# Altium PCB BioSens.PcbDoc
Units mm, origin at the board's own origin, x right, y up, seen from the top; angles counter-clockwise.
Board outline 100 x 63 mm, 2 copper layers (Top Layer, Bottom Layer); 106 components, 69 nets, 264 pads, 132 vias.
Unrouted connection lines stored in the file: 6.
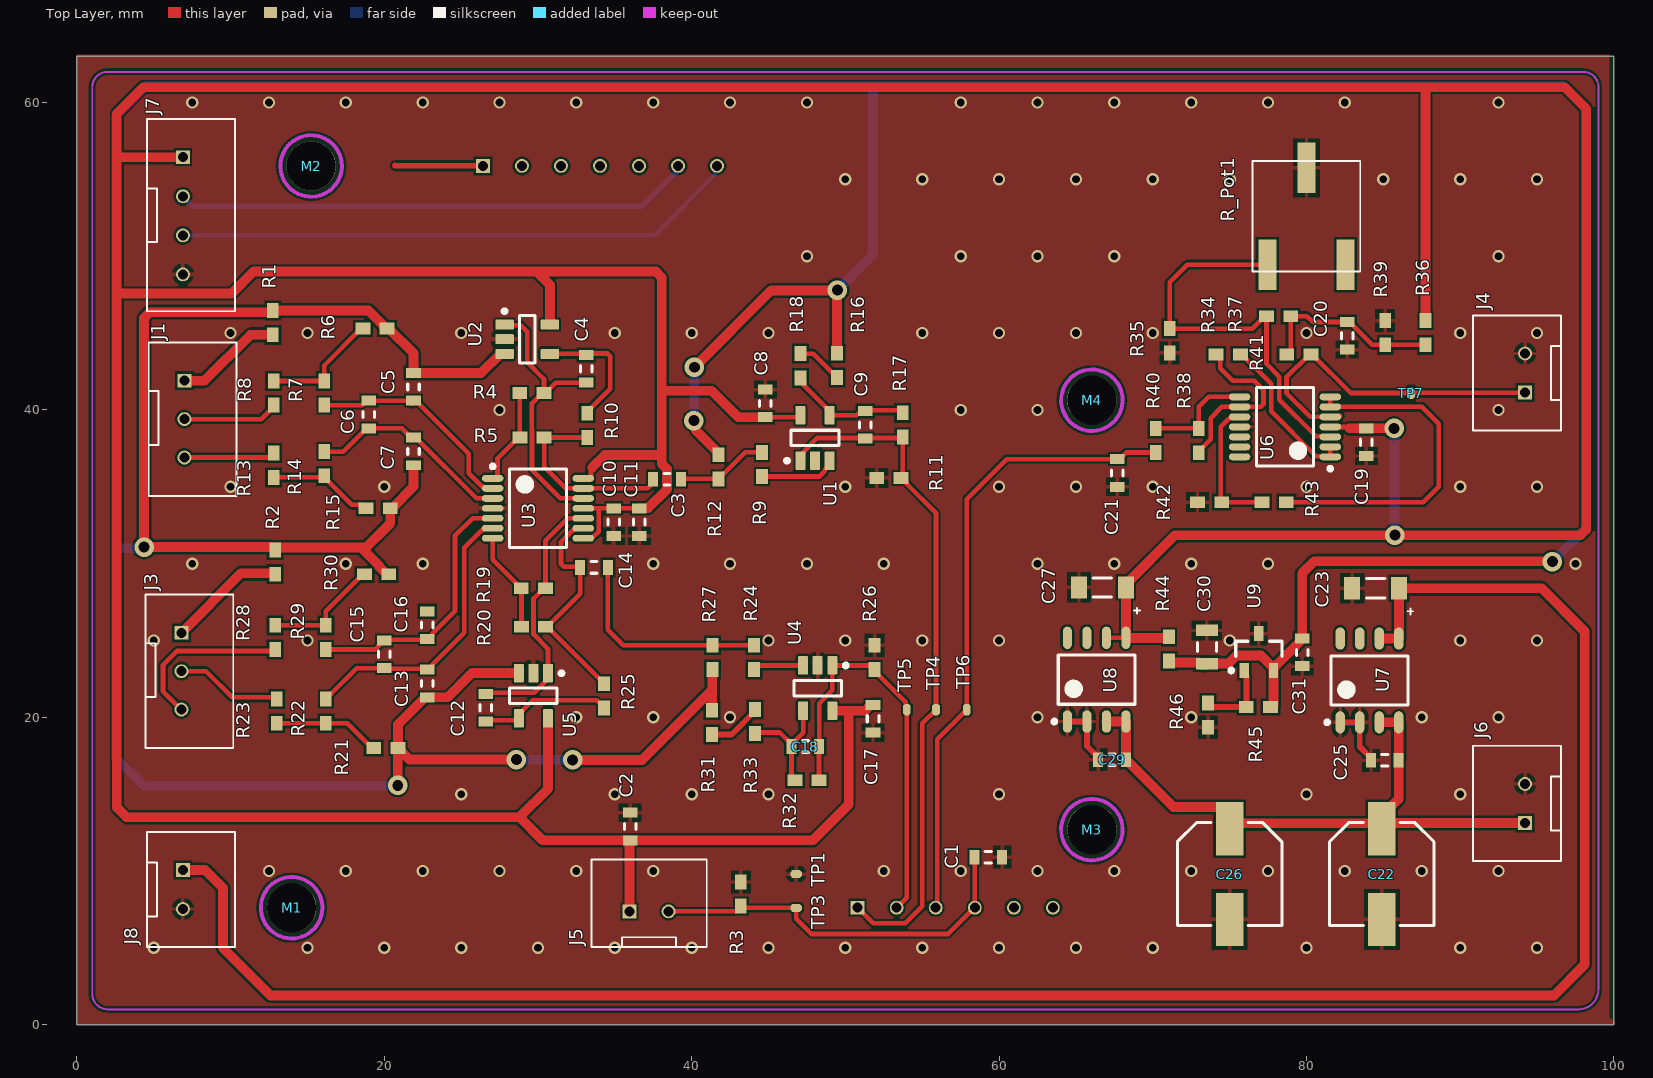
[diagram p0: Top Layer view]
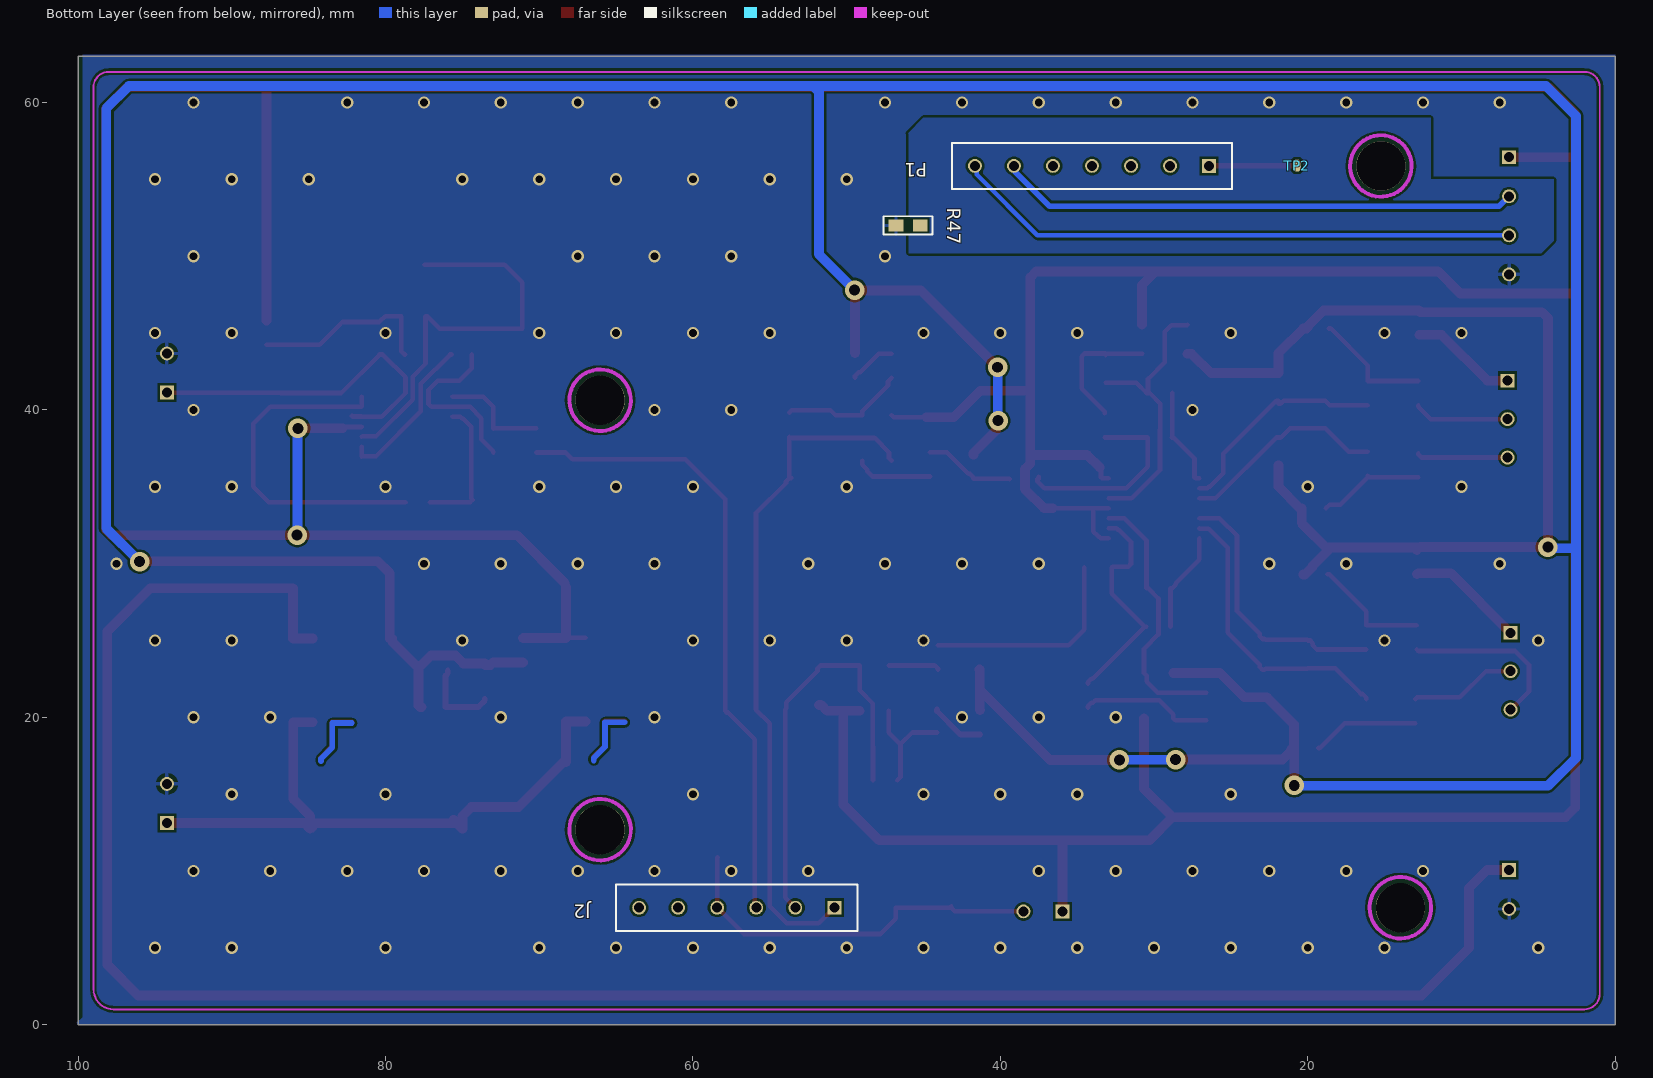
[diagram p1: Bottom Layer view, seen from below]

## Layer stack, top to bottom
Top Solder: solder mask 0.0102, Solder Resist, Dk 3.5
Top Layer: signal copper 0.0356
Dielectric 1: dielectric 0.32, FR-4, Dk 4.8
Bottom Layer: signal copper 0.0356
Bottom Solder: solder mask 0.0102, Solder Resist, Dk 3.5

## Board outline
0,0 0,63 100,63 100,0

## Design rules (kind name [scope] priority, off if disabled: settings)
Clearance [All] p1: gap=0.15 ignorepadtopadclearanceinfootprint=FALSE
HoleSize [All] p1: absolutevalues=TRUE maxlimit=6.3 minlimit=0.2 maxpercent=80.000 minpercent=20.000
HoleToHoleClearance [All] p1: gap=0.5 allowstackedmicrovias=TRUE
PolygonConnect [All] p1: connectstyle=Relief reliefconductorwidth=0.254 reliefentries=4 polygonreliefangle="90 Angle" airgapwidth=0.254
RoutingVias "PWR 3V3" [InNet('3V3')] p1: holewidth=0.635 width=1.27 viastyle="Through Hole" minholewidth=0.508 minwidth=1.27 maxholewidth=0.762 maxwidth=1.27
RoutingVias "PWR 1V25" [InNet('1V25_VREF')] p2: holewidth=0.635 width=1.27 viastyle="Through Hole" minholewidth=0.508 minwidth=1.27 maxholewidth=0.762 maxwidth=1.27
RoutingVias [All] p3: holewidth=0.381 width=1.27 viastyle="Through Hole" minholewidth=0.305 minwidth=0.508 maxholewidth=0.381 maxwidth=1.27
SolderMaskExpansion [All] p1: expansion=0.102 istentingtop=FALSE
Width "Battery In" [InNet('V_Batt')] p1: maxlimit=0.762 minlimit=0.381 preferedwidth=0.635 // 5.5~10V
Width "Power Trace 1V25" [InNet('1V25_VREF')] p2: maxlimit=0.762 minlimit=0.305 preferedwidth=0.635 // 1V25
Width "NET1_1 (EMG)J1" [InNet('NetJ1_1')] p3: maxlimit=0.762 minlimit=0.305 preferedwidth=0.635 // 1V25
Width "NET3_1 (EMG)J1" [InNet('NetJ3_1')] p4: maxlimit=0.762 minlimit=0.305 preferedwidth=0.635 // 1V25
Width "Power Trace 3V3 NRF" [InNet('NetC23_1')] p5: maxlimit=0.762 minlimit=0.305 preferedwidth=0.635 // 3V3
Width "Power Trace 3V3" [InNet('3V3')] p6: maxlimit=0.762 minlimit=0.305 preferedwidth=0.635 // 3V3 Power traces
Width [All] p7: maxlimit=0.381 minlimit=0.152 preferedwidth=0.305
28 further rules are at their usual default settings.

## Classes and differential pairs
component class Top: C1 C2 J1 J2 J3 J4 J5 J6 J7 J8 M1 M2 M3 M4 P1 R1 R2 R3 R47 TP1 TP2 TP3
component class Power: C22 C23 C25 C26 C27 C29 C30 C31 R44 R45 R46 U7 U8 U9
component class GSR: C19 C20 C21 R34 R35 R36 R37 R38 R39 R40 R41 R42 R43 R_Pot1 TP6 TP7 U6
component class EMG_SET: C3 C4 C5 C6 C7 C8 C9 C10 C11 C12 C13 C14 C15 C16 C17 C18 R4 R5 R6 R7 R8 R9 R10 R11 R12 R13 R14 R15 R16 R17 R18 R19 R20 R21 R22 R23 R24 R25 R26 R27 R28 R29 R30 R31 R32 R33 TP4 U1 U2 U3 U4 U5

## Components (designator, comment, footprint, x,y, rotation, side; value= is the part's Value field where it differs from the comment)
C1 "0603 4.7uF" CAP_0603_CER 59.3,10.9 r0 top
C2 "0603 4.7uF" CAP_0603_CER 36,12.9 r90 top
C3 "0603 1uF" CAP_0603_CER 38.393,35.5 r0 top
C4 "0603 1uF" CAP_0603_CER 33.15,42.675 r90 top
C5 "0603 100pF" CAP_0603_CER 21.9,41.5 r270 top
C6 "0603 10nF" CAP_0603_CER 19,39.7 r90 top
C7 "0603 100pF" CAP_0603_CER 21.9,37.3 r270 top
C8 "0603 0.1uF" CAP_0603_CER 44.8,40.425 r270 top
C9 "0603 1uF" CAP_0603_CER 51.3,39.025 r270 top
C10 "0603 0.1uF" CAP_0603_CER 34.925,32.7 r270 top
C11 "0603 1uF" CAP_0603_CER 36.6,32.7 r270 top
C12 "0603 1uF" CAP_0603_CER 26.6,20.625 r270 top
C13 "0603 100pF" CAP_0603_CER 22.8,22.2 r90 top
C14 "0603 1uF" CAP_0603_CER 33.65,29.75 r0 top
C15 "0603 10nF" CAP_0603_CER 20,24.1 r270 top
C16 "0603 100pF" CAP_0603_CER 22.8,26 r90 top
C17 "0603 0.1uF" CAP_0603_CER 51.8,19.9 r90 top
C18 "0603 1uF" CAP_0603_CER 47.4,18.1 r0 top
C19 "0603 0.1uF" CAP_0603_CER 83.9,37.9 r270 top
C20 "0603 0.1uF" CAP_0603_CER 82.65,44.825 r270 top
C21 "0603 0.1uF" CAP_0603_CER 67.7,35.9 r270 top
C22 "100uF" CAPAE7866X61M 84.9,9.8 r270 top
C23 "1206_T 10uF" CAP_1206_TANT 84.5,28.4 r180 top
C25 "0603 0.1uF" CAP_0603_CER 85.1,17.2 r180 top
C26 "100uF" CAPAE7866X61M 75,9.8 r270 top
C27 "1206_T 10uF" CAP_1206_TANT 66.725,28.45 r180 top
C29 "0603 0.1uF" CAP_0603_CER 67.35,17.25 r180 top
C30 "0805 10uF" CAP_0805_CER 73.525,24.575 r90 top
C31 "0603 0.1uF" CAP_0603_CER 79.725,24.225 r270 top
J1 "JSET 2" JST-XH3A 7,39.4 r0 top
J2 "6 Pin Socket" "6 Pin Header" 50.8,7.61 r270 bottom
J3 "JSET 2" JST-XH3A 6.8,23 r0 top
J4 "JSET 2.0" JST_XH2A 93.7,42.4 r180 top
J5 "JSET 2.0" JST_XH2A 37.23,7.9 r90 top
J6 "JSET 2.0" JST_XH2A 93.7,14.4 r180 top
J7 "4 Pin Socket" JST-XH4A 7.425,52.67 r0 top
J8 "JSET 2.0" JST_XH2A 7.425,8.8 r0 top
M1 "Mounting Hole" "Mounting Hole" 13.97,7.61 r0 top
M2 "Mounting Hole" "Mounting Hole" 15.24,55.87 r0 top
M3 "Mounting Hole" "Mounting Hole" 66.04,12.69 r0 top
M4 "Mounting Hole" "Mounting Hole" 66.04,40.63 r0 top
P1 "7 Pin Header" "7 Pin Header" 26.416,55.88 r270 bottom
R1 "0603 0" 0603 12.75,45.675 r270 top
R2 "0603 0" 0603 12.9,30.1 r270 top
R3 "0603 10k 1%" 0603 43.2,8.5 r90 top
R4 "0603 10k 1%" 0603 29.6,41.1 r0 top
R5 "0603 10k 1%" 0603 29.613,38.2 r180 top
R6 "0603 3.3M" 0603 19.4,45.3 r0 top
R7 "0603 2k 1%" 0603 16.1,41.1 r90 top
R8 "0603 2k 1%" 0603 12.8,41.1 r270 top
R9 "0603 0" 0603 44.575,36.45 r90 top
R10 "0603 100k 1%" 0603 33.2,39 r90 top
R11 "0603 10k 1%" 0603 52.825,35.575 r180 top
R12 "0603 1M 1%" 0603 41.75,36.3 r270 top
R13 "0603 2k 1%" 0603 12.8,36.4 r90 top
R14 "0603 2k 1%" 0603 16.1,36.5 r270 top
R15 "0603 3.3M" 0603 19.6,33.6 r0 top
R16 "0603 0" 0603 49.45,42.9 r90 top
R17 "0603 100k 1%" 0603 53.725,39.025 r270 top
R18 "0603 1k 1%" 0603 47.075,42.875 r270 top
R19 "0603 10k 1%" 0603 29.7,28.4 r0 top
R20 "0603 10k 1%" 0603 29.713,25.9 r180 top
R21 "0603 3.3M" 0603 20.1,18 r0 top
R22 "0603 2k 1%" 0603 16.2,20.4 r270 top
R23 "0603 2k 1%" 0603 13,20.4 r90 top
R24 "0603 0" 0603 44.05,23.9 r90 top
R25 "0603 100k 1%" 0603 34.3,21.4 r270 top
R26 "0603 10k 1%" 0603 51.9,23.9 r90 top
R27 "0603 1M 1%" 0603 41.35,23.9 r90 top
R28 "0603 2k 1%" 0603 12.9,25.2 r270 top
R29 "0603 2k 1%" 0603 16.2,25.2 r90 top
R30 "0603 3.3M" 0603 19.5,29.3 r0 top
R31 "0603 0" 0603 41.325,19.675 r90 top
R32 "0603 100k 1%" 0603 47.5,15.9 r0 top
R33 "0603 1k 1%" 0603 44.125,19.725 r270 top
R34 "0603 100k 1%" 0603 74.913,43.6 r180 top
R35 "0603 0" 0603 71.1,44.5 r270 top
R36 "0603 4.7k 1%" 0603 87.75,45.025 r270 top
R37 "0603 200k 1%" 0603 78.187,46.1 r180 top
R38 "0603 200k 1%" 0603 73,38 r270 top
R39 "0603 4.7k 1%" 0603 85.125,45.025 r90 top
R40 "0603 1M" 0603 70.2,38.013 r270 top
R41 "0603 200k 1%" 0603 79.5,43.6 r0 top
R42 "0603 200k 1%" 0603 73.7,34 r0 top
R43 "0603 100k 1%" 0603 77.9,34 r0 top
R44 "0603 330" 0603 71.05,24.45 r270 top
R45 "0603 2k 1%" 0603 76.875,20.675 r180 top
R46 "0603 10k 1%" 0603 73.6,20.137 r270 top
R47 "0603 0" 0603 46,52 r180 bottom
R_Pot1 "200k Pot" R_200k_Pot 80,52.6 r0 top
TP1 "0402_TEST_PT" 0402_PAD#1 46.8,9.8 r0 top
TP2 "0402_TEST_PT" 0402_PAD#2 20.7,55.9 r90 top
TP3 "0402_TEST_PT" 0402_PAD#1 46.8,7.6 r0 top
TP4 "0402_TEST_PT" 0402_PAD#1 55.9,20.5 r270 top
TP5 "0402_TEST_PT" 0402_PAD#1 54,20.5 r90 top
TP6 "0402_TEST_PT" 0402_PAD#1 57.9,20.5 r90 top
TP7 "0402_TEST_PT" 0402_PAD#1 86.8,41.1 r90 top
U1 "OPA333AIDBVT" DBV0005A_M 48.025,38.175 r90 top
U2 "OPA333AIDBVT" DBV0005A_M 29.3,44.6 r0 top
U3 "INA2331AIPWR" TSOP65P640X120-14N 30,33.6 r0 top
U4 "OPA333AIDBVT" DBV0005A_M 48.2,21.9 r270 top
U5 "OPA333AIDBVT" DBV0005A_M 29.7,21.4 r270 top
U6 "LM324PW" TSOP65P640X120-14N 78.6,38.9 r180 top
U7 "TPS76733QDR" SOIC127P600X175-8N 84.1,22.4 r90 top
U8 "TPS76733QDR" SOIC127P600X175-8N 66.35,22.45 r90 top
U9 "AZ432ANTR-G1" SOT95P245X110-3N 76.9,24.25 r90 top

## Footprints (in the part's own frame and the unit in brackets; to place one, negate y for a bottom-side part, rotate by r counter-clockwise, add the part's x,y. Pads: shape width x height; smd on the part's side, far side on the other; paste and mask are expansions set on the pad)
"6 Pin Header" [mm] "Biosignals output to NRF Digital IN"
  rect 0.904x0.904 hole 0.65: 1(0,0)
  round 0.904 hole 0.65: 2(0,-2.54) 3(0,-5.08) 4(0,-7.62) 5(0,-10.16) 6(0,-12.7)
  silkscreen extent -1.5,-14.2 1.5,1.5
"7 Pin Header" [mm] "Biosignals output to NRF Digital IN"
  rect 0.904x0.904 hole 0.65: 1(0,0)
  round 0.904 hole 0.65: 2(0,-2.54) 3(0,-5.08) 4(0,-7.62) 5(0,-10.16) 6(0,-12.7) 7(0,-15.24)
  silkscreen extent -1.5,-16.74 1.5,1.5
0402_PAD#1 [mil]
  oct 30x20 smd paste-2.5 mask+1: 1(0,0)
0402_PAD#2 [mil]
  oct 30x20 smd far side paste-2.5 mask+1: 1(0,0)
0603 [mil]
  rect 38x30 smd mask+2.5: 1(-31,0) 2(31,0)
CAP_0603_CER [mm] "Ceremic Cap 0603"
  rect 0.65x0.95 smd: 1(-0.9,0) 2(0.9,0)
  silkscreen extent -0.2,-0.38 0.2,0.38, body extent -0.85,-0.45 0.85,0.45, height 0.9
CAP_0805_CER [mm] "Ceremic Cap 0805"
  rect 0.75x1.45 smd: 1(-1.075,0) 2(1.075,0)
  silkscreen extent -0.3,-0.62 0.3,0.63, body extent -1.1,-0.72 1.1,0.72, height 1.45
CAP_1206_TANT [mm] "Tantalum Cap 1206"
  rect 1.05x1.45 smd: 1(-1.525,0) 2(1.525,0)
  silkscreen extent -2.44,-0.62 0.6,1.7, body extent -1.7,-0.65 1.7,0.65, height 1.8
CAPAE7866X61M [mm] "Aluminum Electrolytic Capacitor, Body 6.35x6.60x6.10mm, IPC Low Density"
  rect 3.45x1.8 smd: 1(-2.95,0) 2(2.95,0)
  silkscreen extent -3.35,-3.4 3.35,3.4, body extent -3.4,-3.4 3.4,3.4, height 6.1
DBV0005A_M [mm] "SOT23, 5-Leads, Body 3.05x1.75mm, Pitch 0.95mm, IPC Low Density"
  rrect15% 1.2x0.65 smd: 1(-1.475,0.95) 2(-1.475,0) 3(-1.475,-0.95) 4(1.475,-0.95) 5(1.475,0.95)
  silkscreen extent -1.6,-1.55 0.5,1.95, body extent -1.42,-1.46 1.42,1.46, height 1.08
JST-XH3A [mm]
  rect 0.904x0.904 hole 0.65: 1(0,2.5)
  round 0.904 hole 0.65: 2(0,0) 3(0,-2.5)
  silkscreen extent -2.32,-5 3.37,5
JST-XH4A [mm]
  rect 0.904x0.904 hole 0.65: 1(-0.525,3.77)
  round 0.904 hole 0.65: 2(-0.525,1.23) 3(-0.525,-1.31) 4(-0.525,-3.85)
  silkscreen extent -2.85,-6.25 2.85,6.25
JST_XH2A [mm]
  rect 0.904x0.904 hole 0.65: 1(-0.525,1.27)
  round 0.904 hole 0.65: 2(-0.525,-1.27)
  silkscreen extent -2.85,-3.75 2.85,3.75
"Mounting Hole" [mm]
  round 3.2 hole 3.2: 1(0,0)
R_200k_Pot [mm]
  rect 1.19x3.3 smd: 1(2.54,-3.15) 2(0,3.15) 3(-2.54,-3.15)
  silkscreen extent -3.5,-3.6 3.5,3.6
SOIC127P600X175-8N [mm] "SOIC, 8-Leads, Body 4.91x3.90mm, Pitch 1.27mm, IPC Medium Density"
  oval 1.45x0.6 smd: 1(-2.725,1.905) 2(-2.725,0.635) 3(-2.725,-0.635) 4(-2.725,-1.905) 5(2.725,-1.905) 6(2.725,-0.635) 7(2.725,0.635) 8(2.725,1.905)
  silkscreen extent -2.85,-2.5 1.6,2.88, body extent -2,-2.5 2,2.5, height 1.75
SOT95P245X110-3N [mm] "SOT23, 3-Leads, Body 2.90x2.45mm, Pitch 0.95mm, IPC Medium Density"
  rect 1x0.6 smd: 1(-1.2,0.95) 2(-1.2,-0.95) 3(1.2,0)
  silkscreen extent -1.32,-1.5 0.7,1.92, body extent -0.7,-1.5 0.7,1.5, height 1.1
TSOP65P640X120-14N [mm] "TSOP, 14-Leads, Body 5.00x4.40mm, Pitch 0.65mm, IPC Medium Density"
  oval 1.4x0.45 smd: 1(-2.95,1.95) 2(-2.95,1.3) 3(-2.95,0.65) 4(-2.95,0) 5(-2.95,-0.65) 6(-2.95,-1.3) 7(-2.95,-1.95) 8(2.95,-1.95) 9(2.95,-1.3) 10(2.95,-0.65) 11(2.95,0) 12(2.95,0.65) 13(2.95,1.3) 14(2.95,1.95)
  silkscreen extent -3.07,-2.55 1.85,2.85, body extent -2.25,-2.55 2.25,2.55, height 1.2

## Part data
C1 C2: library part CAP_NP, "Generic Cap for NC (No Polar) / ESR <30mOhm / ESL <1.5nH, / X5R", Capacitance=4.7uF, Dielectric=X5R, Manufacturer="Samsung Electro-Mechanics", Manufacturer Part Number=CL10A475KO8NNNC, Package=0603, Supplier Part Number 1=1276-1784-1-ND, ComponentLink1Description="New link", Supplier 1=Digi-Key
C3 C4 C11 C12 C14: library part CAP_NP, "Generic Cap for NC (No Polar) / ESR <30mOhm / ESL <1.5nH, / X5R", Capacitance=1uF, Dielectric=X7R, Manufacturer=KEMET, Manufacturer Part Number=C0603C105K8RAC7867, Package=0603, ComponentLink1Description="New link"
C5 C7 C13 C16: library part CAP_NP, "Generic Cap for NC (No Polar) / ESR <30mOhm / ESL <1.5nH, / C0G", Capacitance=100pF, Dielectric=C0G, Manufacturer=KEMET, Manufacturer Part Number=C0603C101J3GAC7867, Package=0603, ComponentLink1Description="New link"
C6 C15: library part CAP_NP, "Generic Cap for NC (No Polar) / ESR <30mOhm / ESL <1.5nH, / X7R", Capacitance=10nF, Dielectric=X7R, Manufacturer=KEMET, Manufacturer Part Number=C0603C103K4REC7867, Package=0603, ComponentLink1Description="New link"
C8 C10 C17 C19 C20 C31: library part CAP_NP, "Generic Cap for NC (No Polar) / ESR <30mOhm / ESL <1.5nH, / X7R", Capacitance=0.1uF, Dielectric=X7R, Manufacturer=KEMET, Manufacturer Part Number=C0603C104K5RAC7867, Package=0603, ComponentLink1Description="New link"
C9 C18: library part CAP_NP, "Generic Cap for NC (No Polar) / ESR <30mOhm / ESL <1.5nH, / X7R", Capacitance=1uF, Dielectric=X7R, Manufacturer=KEMET, Manufacturer Part Number=C0603C105K8RAC7867, Package=0603, ComponentLink1Description="New link"
C21: library part CAP_NP, "Generic Cap for NC (No Polar) / ESR <30mOhm / ESL <1.5nH, / X7R or X5R", Capacitance=0.1uF, Dielectric=X7R, Manufacturer=KEMET, Manufacturer Part Number=C0603C104K5RAC7867, Package=0603, ComponentLink1Description="New link"
C22 C26: library part CAP_POL, "Electrolytic 100uF", Manufacturer="Cornell Dubilier Electronics (CDE)", Manufacturer Part Number=AFK107M16D16T-F, Package=CAPAE, Supplier Part Number 1=338-2140-1-ND, Capacitance=100uF, Supplier 1=Digi-Key
C23 C27: library part CAP_POL, "Tantalum CAP / ESR: 900mOhm / Rated: 10V", Capacitance=10uF, Manufacturer="KYOCERA AVX", Manufacturer Part Number=TPSA106K010R0900, Package=1206, Supplier Part Number 1=478-1751-1-ND, Tolerance="+/- 10%", ESR="900m Ohm", Supplier 1=Digi-Key
C25 C29: library part CAP_NP, "Generic Cap for NC (No Polar) / ESR <30mOhm / ESL <1.5nH, / X7R", Capacitance=0.1uF, Dielectric=X7R, Manufacturer="KYOCERA AVX", Manufacturer Part Number=06033C104K4T4A, Package=0603, Supplier Part Number 1=478-10673-1-ND, ComponentLink1Description="New link", Supplier 1=Digi-Key
C30: library part CAP_NP, "Generic Cap for NC (No Polar) / ESR <30mOhm / ESL <1.5nH, / X7R", Capacitance=10uF, Dielectric=X7R, Manufacturer=KEMET, Manufacturer Part Number=C0805C106M8RACTU, Package=0603, ComponentLink1Description="New link"
J1 J3: library part "JST 3 Pin", "JST-XH3A"
J2: "Headers for Signal to NRF"
J4 J5 J6 J8: library part "JST 2 Pin", "PA Series 2 Position 2 mm Pitch Top Entry No Boss Through Hole Shrouded Header", Color=Natural, Housing Color=White, Manufacturer=JST, Manufacturer Part Number=B02B-PASK(LF)(SN), Category="Headers and Wire Housings", ComponentLink1Description=https://datasheet.ciiva.com/712/epa-f-712485.pdf?src-supplier=Digi-Key, ComponentLink1URL=https://datasheet.ciiva.com/712/epa-f-712485.pdf?src-supplier=Digi-Key, Connector Type="Male Pin", Contact Material="Copper Alloy", Contact Mating Length=0.126inch, Contact Plating=Tin, Contact Type="Male Pin", Fastening Type=Ramp, Lead Free="Lead Free", Mount="Through Hole", Number of Contacts=2, Number of Positions=2, Number of Rows=1, Packaging=Bulk, Pitch=0.079inch, Pricing 1="1=0.25000, 10=0.20800, 100=0.15980, 500=0.13522, 1000=0.11064, 5000=0.09835, 10000=0.08913 (USD)", RoHS=Yes, Series=PA, Stock 1=64007, Termination="Kinked Pin"
J7: library part "JST 4 Pin", "Connector Header, PA Series, Top Entry , 4 Position, Male Pin, 1 Row, 2.0mm, Through Hole, Natural", Color=Natural, Housing Color=White, Manufacturer=JST, Manufacturer Part Number=B04B-PASK(LF)(SN), Supplier Part Number 1=455-1819-ND, Category=Connectors, ComponentLink1Description=https://datasheet.ciiva.com/712/epa-f-712564.pdf?src-supplier=Digi-Key, ComponentLink1URL=https://datasheet.ciiva.com/712/epa-f-712564.pdf?src-supplier=Digi-Key, Connector Type="Male Pin", Contact Material="Copper Alloy", Contact Mating Length=0.126inch, Contact Plating=Tin, Contact Type="Male Pin", Fastening Type=Ramp, Lead Free="Lead Free", Mount="Through Hole", Number of Contacts=4, Number of Positions=4, Number of Rows=1, Packaging=Bulk, Pitch=0.079inch, Pricing 1="1=0.34000, 10=0.28700, 100=0.22360, 500=0.19162, 1000=0.15968, 5000=0.13687, 10000=0.12774 (USD)", RoHS=Yes, Series=PA, Stock 1=11525, Supplier 1=Digi-Key, Termination="Kinked Pin"
P1: library part "7 Pin Socket", "KK 254 Wire-to-Board Header Single Row Vertical 7 Circuits PA Polyamide Nylon Tin (Sn) Plating", Color=White, Contact Resistance=10mR, Current Rating=4A, Flammability Rating="UL94 V-0", Insulation Resistance=50GR, Manufacturer=Molex, Manufacturer Part Number=22-03-2071, Max Operating Temperature=75°C, Max Voltage Rating (AC)=250V, Min Operating Temperature=0°C, Supplier Part Number 1=WM4005-ND, Category="Headers and Wire Housings", ComponentLink1Description=https://datasheet.ciiva.com/5147/0022032071-pcb-headers-158424-5147929.pdf?src-supplier=Mouser, ComponentLink1URL=https://datasheet.ciiva.com/5147/0022032071-pcb-headers-158424-5147929.pdf?src-supplier=Mouser, ComponentLink2Description=https://datasheet.ciiva.com/11747/0900766b80027332-11747589.pdf?src-supplier=RSComponents, ComponentLink2URL=https://datasheet.ciiva.com/11747/0900766b80027332-11747589.pdf?src-supplier=RSComponents, ComponentLink3Description=https://datasheet.ciiva.com/16656/0022032071-pcb-headers-16656194.pdf?src-supplier=Avnet+Europe, ComponentLink3URL=https://datasheet.ciiva.com/16656/0022032071-pcb-headers-16656194.pdf?src-supplier=Avnet+Europe, ComponentLink4Description=https://datasheet.ciiva.com/19461/878614-19461332.pdf?src-supplier=Jameco, ComponentLink4URL=https://datasheet.ciiva.com/19461/878614-19461332.pdf?src-supplier=Jameco, ComponentLink5Description=https://datasheet.ciiva.com/10087/0022032071-pcb-headers-10087718.pdf?src-supplier=Avnet, ComponentLink5URL=https://datasheet.ciiva.com/10087/0022032071-pcb-headers-10087718.pdf?src-supplier=Avnet, ComponentLink6Description=https://datasheet.ciiva.com/1433/1533907-1433547.pdf?src-supplier=Element14, ComponentLink6URL=https://datasheet.ciiva.com/1433/1533907-1433547.pdf?src-supplier=Element14, ComponentLink7Description=https://datasheet.ciiva.com/1433/1831754-1433548.pdf?src-supplier=Element14, ComponentLink7URL=https://datasheet.ciiva.com/1433/1831754-1433548.pdf?src-supplier=Element14, ComponentLink8Description=https://datasheet.ciiva.com/15217/getdatasheetpartid-176575-15217532.pdf?src-supplier=Verical, ComponentLink8URL=https://datasheet.ciiva.com/15217/getdatasheetpartid-176575-15217532.pdf?src-supplier=Verical, Contact Gender=Male, Contact Material=Brass, Contact Mating Length=0.295inch, Contact Plating=Tin,Copper, Contact Type="Male Pin", Depth=2.34mm, Gender=Male, Glow Wire Compliant=Non-compliant, Halogen Free="Low Halogen", Height=6.3mm, Housing Color=White, Housing Material=Nylon, Lead Free="Lead Free", Length=17.53mm, Max Current Rating=4A, Mount="Through Hole", Number of Circuits=7, Number of Contacts=7, Number of Positions=7, Number of Rows=1, Orientation=Straight, Packaging=Bulk, Pitch=2.54mm, Pricing 1="1=0.82000, 10=0.69600, 100=0.54110, 1000=0.42516, 5000=0.37362, 10000=0.34785 (USD)", Radiation Hardening=No, REACH SVHC=Unknown, RoHS=Yes, RoHS Compliant=Yes, Series="KK® 4030", Stock 1=11624, Supplier 1=Digi-Key, Termination=Solder, Voltage Rating=250V, Voltage Rating (DC)=250V, Weight=0.016932oz
R1 R2 R9 R16 R24 R31 R47: library part RESISTOR, "Generic Resistor", Manufacturer=YAGEO, Package=0603, Resistance=0
R3 R4 R5 R11 R19 R20 R26 R46: library part RESISTOR, "Generic Resistor", Manufacturer=YAGEO, Package=0603, Resistance=10k
R6 R15: library part RESISTOR, "Generic Resistor", Package=0603
R7 R8 R13 R14 R22 R23 R28 R29 R45: library part RESISTOR, "Generic Resistor", Manufacturer=YAGEO, Package=0603, Resistance=2k
R10 R17 R25 R32: library part RESISTOR, "Generic Resistor", Manufacturer="Vishay Dale", Package=0603, Resistance=100k
R12 R27: library part RESISTOR, "Generic Resistor", Package=0603, Resistance=1M
R18 R33: library part RESISTOR, "Generic Resistor", Manufacturer="Vishay Dale", Package=0603, Resistance=1k
R21 R30: library part RESISTOR, "Generic Resistor", Package=0603, Resistance=3.3M
R34 R43: library part RESISTOR, "Generic Resistor", Manufacturer="Vishay Dale", Manufacturer Part Number=CRCW0402100KFKEDC, Package=0603, Resistance=100k
R35: library part RESISTOR, "Generic Resistor", Manufacturer=YAGEO, Manufacturer Part Number=RC0402FR-070RL, Package=0603, Resistance=0
R36 R39: library part RESISTOR, "Generic Resistor", Manufacturer=YAGEO, Manufacturer Part Number=RC0402FR-074K7L, Package=0603, Resistance=4.7k
R37 R38 R41 R42: library part RESISTOR, "Generic Resistor", Manufacturer=YAGEO, Manufacturer Part Number=RC0402FR-13200KL, Package=0603, Resistance=200k
R40: library part RESISTOR, "Generic Resistor", Manufacturer=YAGEO, Manufacturer Part Number=RC0402FR-071ML, Package=0603, Resistance=1M
R44: library part RESISTOR, "Generic Resistor", Package=0603, Resistance=330
R_Pot1: library part R200k_Pot, "SMD Single-Turn Trimmer Potentiometers 1/4 SQ 200KOHMS 10% 0.5WATTS", Manufacturer=Bourns, Manufacturer Part Number=3361P-1-204GLF, Max Operating Temperature=125°C, Max Power Dissipation=500mW, Min Operating Temperature=-55°C, Package Quantity=750, Resistance=200kR, Resistor Type=Cermet, Supplier Part Number 1=3361P-1-204GLFCT-ND, Temperature Coefficient=100ppm/°C, Tolerance=10%, Category="Variable Resistors and Potentiometers", ComponentLink1Description=https://datasheet.ciiva.com/2157/3361-2157333.pdf?src-supplier=Digi-Key, ComponentLink1URL=https://datasheet.ciiva.com/2157/3361-2157333.pdf?src-supplier=Digi-Key, ComponentLink2Description=https://datasheet.ciiva.com/2157/3361-2157335.pdf?src-supplier=Digi-Key, ComponentLink2URL=https://datasheet.ciiva.com/2157/3361-2157335.pdf?src-supplier=Digi-Key, ComponentLink3Description=https://datasheet.ciiva.com/2157/3361-2157334.pdf?src-supplier=Digi-Key, ComponentLink3URL=https://datasheet.ciiva.com/2157/3361-2157334.pdf?src-supplier=Digi-Key, ComponentLink4Description=https://datasheet.ciiva.com/15156/getdatasheetpartid-347912-15156998.pdf?src-supplier=Verical, ComponentLink4URL=https://datasheet.ciiva.com/15156/getdatasheetpartid-347912-15156998.pdf?src-supplier=Verical, Contact Plating=Tin,Matte, Depth=8.53mm, Height=0.192inch, Length=6.71mm, Military Standard=Not, Mount="Surface Mount", Number of Turns=1, Packaging="Tape and Reel", Power Rating=500mW, Pricing 1="1=1.26000, 10=1.11000, 25=0.99920, 50=0.96200, 100=0.92500, 250=0.86952 (USD)", Radiation Hardening=No, RoHS=Yes, RoHS Compliant=Yes, Series="Trimpot® 3361 - Sealed", Stock 1=1039, Supplier 1=Digi-Key, Technology=CERMET, Termination="Gull Wing", Width=0.264inch
U1 U2 U4 U5: library part CMP-014-00019-2, "MicroPower, Zero Drift CMOS Operational Amplifier, 1.8 to 5.5 V, 17 uA, -40 to 125 degC, 5-Pin SOT23 (DBV5), Green (RoHS & no Sb/Br), Tape and Reel", Case/Package=SOT-23-5, Manufacturer="Texas Instruments (TI)", Max Dual Supply Voltage=2.75V, Max I/O Voltage=10uV, Max Operating Temperature=125°C, Min Dual Supply Voltage=900mV, Min Operating Temperature=-40°C, Nominal Supply Current=25uA, Nominal Voltage Gain=130dB, Output Current=5mA, Package Description="5-Pin Small Outline Transistor, Body 2.9 x 1.6 mm, Pitch 0.95 mm", Package Quantity=250, Package Reference=DBV0005A, Channels=1, Common Mode Rejection Ratio=106dB, Datasheet URL=http://www.ti.com/general/docs/lit/getliterature.tsp?genericPartNumber=OPA333&fileType=pdf, Datasheet Version="SBOS351E, 12/2015", Manufacturer URL=http://www.ti.com/, Max Supply Voltage=2.75V, Min Supply Voltage=900mV, Mounting Technology=SM, Nominal Gain Bandwith Product=350KHz, Package URL=http://www.ti.com/lit/ml/mpds018l/mpds018l.pdf, Packaging=TapeandReel, Pins=5, RoHS Compliant=True, Slew Rate=0.16V/us, Unity Gain Bandwidth Product=350KHz
U3: "Low-power, single-supply, CMOS, instrumentation amplifier 14-TSSOP -55 to 125", Case/Package=TSSOP, Input Bias Current=10pA, Input Offset Voltage (Vos)=1mV, Input Resistance=10000GR, Manufacturer="Texas Instruments", Max Operating Temperature=125°C, Max Supply Voltage=5.5V, Min Operating Temperature=-55°C, Min Supply Voltage=2.7V, Nominal Supply Current=980uA, Operating Supply Current=415uA, Output Current per Channel=48mA, Package Quantity=1, Power Supply Rejection Ratio (PSRR)=86.02dB, Supplier Part Number 1=296-44980-1-ND, Voltage Gain=60dB, -3db Bandwidth=2MHz, Bandwidth=2MHz, Category="Amplifiers - Op Amps, Buffer, Instrumentation", Common Mode Rejection Ratio=80dB, ComponentLink1Description=https://datasheet.ciiva.com/1814/ina2331-1814816.pdf?src-supplier=Digi-Key, ComponentLink1URL=https://datasheet.ciiva.com/1814/ina2331-1814816.pdf?src-supplier=Digi-Key, ComponentLink2Description=https://datasheet.ciiva.com/15128/getdatasheetpartid-248786-15128608.pdf?src-supplier=Verical, ComponentLink2URL=https://datasheet.ciiva.com/15128/getdatasheetpartid-248786-15128608.pdf?src-supplier=Verical, ComponentLink3Description=https://datasheet.ciiva.com/26852/ina2331aipwr-26852132.pdf?src-supplier=IIIC, ComponentLink3URL=https://datasheet.ciiva.com/26852/ina2331aipwr-26852132.pdf?src-supplier=IIIC, ComponentLink4Description=https://datasheet.ciiva.com/1814/ina2331-1814814.pdf?src-supplier=Digi-Key, ComponentLink4URL=https://datasheet.ciiva.com/1814/ina2331-1814814.pdf?src-supplier=Digi-Key, ComponentLink5Description=https://datasheet.ciiva.com/1814/ina2331-1814815.pdf?src-supplier=Digi-Key, ComponentLink5URL=https://datasheet.ciiva.com/1814/ina2331-1814815.pdf?src-supplier=Digi-Key, ComponentLink6Description=https://datasheet.ciiva.com/2978/ina331-2978080.pdf?src-supplier=Avnet, ComponentLink6URL=https://datasheet.ciiva.com/2978/ina331-2978080.pdf?src-supplier=Avnet, Contact Plating=Gold, Gain Bandwidth Product=2MHz, Lead Free="Lead Free", Manufacturer Part Number=INA2331AIPWR, Number of Channels=2, Number of Circuits=2, Number of Elements=6, Number of Pins=14, Packaging="Tape and Reel", Pricing 1="1=3.12000, 10=2.79800, 25=2.64480, 100=2.29230, 250=2.17476, 500=1.95140, 1000=1.94075 (USD)", Quiescent Current=415uA, Radiation Hardening=No, RoHS=Yes, RoHS Compliant=Yes, Series=-, Slew Rate=5V/µs, Stock 1=163, Supplier 1=Digi-Key, Supply Current=980uA
U6: "Integrated Circuit Operational Amplifier LM324/TSSOP/LM324PW TEXAS INSTRUMENT RoHS TSSOP14", Case/Package=TSSOP, Dual Supply Voltage=9V, Input Bias Current=250nA, Input Offset Voltage (Vos)=7mV, Manufacturer="Texas Instruments", Max Dual Supply Voltage=16V, Max Operating Temperature=70°C, Max Supply Voltage=32V, Min Dual Supply Voltage=1.5V, Min Operating Temperature=0°C, Min Supply Voltage=3V, Nominal Supply Current=3mA, Operating Supply Current=1.4mA, Output Current=30mA, Output Current per Channel=60mA, Package Quantity=90, Supplier Part Number 1=296-26098-5-ND, Voltage Gain=100dB, Amplifier Type="GENERAL PURPOSE", Bandwidth=1.2MHz, Category="Amplifiers - Op Amps, Buffer, Instrumentation", Common Mode Rejection Ratio=65dB, ComponentLink1Description=https://datasheet.ciiva.com/1796/lm324-1796594.pdf?src-supplier=Digi-Key, ComponentLink1URL=https://datasheet.ciiva.com/1796/lm324-1796594.pdf?src-supplier=Digi-Key, ComponentLink2Description=https://datasheet.ciiva.com/7709/1633632-7709818.pdf?src-supplier=Element14, ComponentLink2URL=https://datasheet.ciiva.com/7709/1633632-7709818.pdf?src-supplier=Element14, Gain Bandwidth Product=1.2MHz, Height=1.15mm, Lead Free="Lead Free", Length=5mm, Manufacturer Part Number=LM324PW, Mount="Surface Mount", Number of Amplifiers=4, Number of Channels=4, Number of Circuits=4, Number of Elements=4, Number of Pins=14, Operating Supply Voltage=16V, Packaging=Rail/Tube, Pricing 1="1=0.95000, 10=0.84700, 25=0.80440, 100=0.66070, 250=0.61760, 500=0.54580, 1000=0.47425 (USD)", Radiation Hardening=No, REACH SVHC="No SVHC", RoHS=Yes, RoHS Compliant=Yes, Series=-, Slew Rate=0.5V/µs, Stock 1=4297, Supplier 1=Digi-Key, Supply Current=3mA, Technology=BIPOLAR, Unity Gain Bandwidth Product=1.2MHz, Width=4.4mm
U7 U8: "IC REG LDO 3.3V 1A 8SOIC / LDO Regulator Pos 3.3V 1A 8-Pin SOIC T/R", Case/Package=D, Dropout Voltage=350mV, Input Bias Current=85uA, Manufacturer="Texas Instruments", Max Input Voltage=10V, Max Operating Temperature=125°C, Max Output Current=1A, Max Output Voltage=3.3V, Max Power Dissipation=904mW, Min Current Limit=1.2A, Min Input Voltage=2.7V, Min Operating Temperature=-40°C, Output Voltage Accuracy=2%, Package Quantity=2500, Quiescent Current=80uA, Accuracy=2%, Category="Voltage Regulators - Linear", ComponentLink1Description=https://datasheet.ciiva.com/26909/tps76733qdr-26909024.pdf?src-supplier=IIIC, ComponentLink1URL=https://datasheet.ciiva.com/26909/tps76733qdr-26909024.pdf?src-supplier=IIIC, ComponentLink2Description=https://datasheet.ciiva.com/2064/tps76701-2064275.pdf?src-supplier=Digi-Key, ComponentLink2URL=https://datasheet.ciiva.com/2064/tps76701-2064275.pdf?src-supplier=Digi-Key, ComponentLink3Description=https://datasheet.ciiva.com/14275/tps76701-14275656.pdf?src-supplier=Avnet, ComponentLink3URL=https://datasheet.ciiva.com/14275/tps76701-14275656.pdf?src-supplier=Avnet, Lead Free="Lead Free", Manufacturer Part Number=TPS76733QDR, Min Output Voltage=3.3V, Number of Outputs=1, Number of Pins=8, Number of Regulators=1, Output Current=1A, Output Type=Fixed, Output Voltage=3.3V, Packaging="Tape and Reel", Polarity=Positive, Power Dissipation=904mW, RoHS=Yes, RoHS Compliant=Yes, Series=-, Supplier 1="Arrow Electronics", Supplier Part Number 1=TPS76733QDR
U9: "V-Ref Adjustable/Precision/Programmable 1.25V to 18V 100mA 3-Pin SOT-23 T/R", Case/Package=TO-236-3, Cathode Current=80uA, Manufacturer=Diodes, Max Input Voltage=18V, Max Operating Temperature=125°C, Max Output Current=100mA, Min Operating Temperature=-40°C, Min Output Voltage=1.25V, Supplier Part Number 1=AZ432ANTR-G1DICT-ND, Temperature Coefficient=20ppm/°C, Tolerance=0.5%, Category="Voltage References", ComponentLink1Description=http://www.diodes.com/datasheets/AZ432.pdf?src-supplier=Avnet, ComponentLink1URL=http://www.diodes.com/datasheets/AZ432.pdf?src-supplier=Avnet, ComponentLink2Description=https://www.diodes.com/assets/Datasheets/AZ432.pdf?src-supplier=Digi-Key, ComponentLink2URL=https://www.diodes.com/assets/Datasheets/AZ432.pdf?src-supplier=Digi-Key, Manufacturer Part Number=AZ432ANTR-G1, Max Output Voltage=18V, Mount="Surface Mount", Output Current=100mA, Output Type=Adjustable, Output Voltage=18V, Packaging="Tape and Reel", Pricing 1="1=0.49000, 10=0.37200, 25=0.33600, 100=0.23200, 250=0.19536, 500=0.15874, 1000=0.12211 (USD)", Radiation Hardening=No, Reference Type=Shunt, RoHS=Yes, RoHS Compliant=Yes, Stock 1=92, Supplier 1=Digi-Key

## Via types
v1: diameter 0.8, hole 0.5, Top Layer to Bottom Layer, 122 vias
v2: diameter 1.27, hole 0.711, Top Layer to Bottom Layer, 10 vias

## Nets (pads, with @x,y where several pads share a name; then routed paths per layer and width w, separated by ;. In a path a pad name is that pad's centre, name@x,y a point inside that pad or via, vN(x,y) a via of type N, cw(c..) or ccw(c..) an arc to the next point about the centre after c; other vN are vias at no path point)
1V25_VREF: C5.1 C7.2 C13.1 C16.2 C30.1 C31.1 R1.1 R2.1 R6.2 R12.1 R15.2 R16.2 R21.2 R27.1 R30.2 R31.2 R44.2 R45.1 U2.3 U5.3 U9.2 | length 364.1
  Top Layer w0.635: 18.813,31.05 12.963,31.05 12.9,30.986 R2.1 12.9,30.989 12.836,31.053 12.735,31.053 12.712,31.075 v2(4.375,31.075) 4.375,45.989 4.747,46.361 12.687,46.361 12.75,46.424 R1.1 18.975,46.462 20.022,45.415 20.022,45.364 20.086,45.3 R6.2 20.289,45.3 21.9,43.689 C5.1 26.3,42.4 27.55,43.65 U2.3 ; R30.2 20.186,29.3 19.663,29.823 19.663,29.875 18.65,30.887 20.387,32.625 R15.2 20.489,33.6 21.9,35.011 C7.2 ; v2(20.875,15.575) 20.881,15.581 20.881,17.994 R21.2 20.887,19.537 22.65,21.3 24.125,21.3 25.7,22.875 U5.3 ; R21.2@20.989,18 21.053,17.937 21.053,17.835 21.637,17.25 v2(28.6,17.25) ; v2(32.25,17.225) 36.775,17.225 41.338,21.788 ; v2(40.15,39.3) 40.272,39.178 40.272,38.668 41.75,37.189 R12.1 ; v2(40.175,42.775) 45.175,47.775 v2@49.45,47.775 ; R31.2 41.338,20.475 41.338,21.788 ; R27.1 41.338,23.1 41.338,21.788 ; R16.2 49.462,43.7 49.462,47.763 v2@49.45,47.775 ; v2(49.475,47.8) v2@49.45,47.775 ; R44.2@71.05,23.563 73.012,23.563 73.175,23.4 C30.1@73.525,23.4 ; C30.1 74.939,23.5 75.456,24.017 77.047,24.017 U9.2@77.85,23.215 ; R45.1 77.764,20.675 77.85,20.761 U9.2 U9.2@77.85,23.215 ; v2(96,30.125) 95.975,30.15 80.5,30.15 79.725,29.375 C31.1 79.575,25.125 79.568,25.117 79.568,24.932 U9.2@77.85,23.215
  Bottom Layer w0.635: v2(4.375,31.075) 4.3,31 2.55,31 ; v2(20.875,15.575) 20.85,15.55 4.35,15.55 2.55,17.35 2.55,31 ; v2(28.6,17.25) 28.613,17.238 32.237,17.238 v2(32.25,17.225) ; v2(40.15,39.3) 40.163,39.312 40.163,42.763 v2(40.175,42.775) ; v2(49.475,47.8) 51.8,50.125 51.8,60.7 52.172,61.072 ; v2(96,30.125) 98.175,32.3 98.175,59.6 96.703,61.072 52.172,61.072 ; 2.55,31 2.55,59.125 4.497,61.072 52.172,61.072
3V3: C2.1 C8.2 C10.1 C11.1 C17.2 C19.1 C27.1 J5.1 J7.1 R36.1 R44.1 U1.5 U2.5 U3.8 U3.11 U3.14 U4.5 U5.5 U6.4 U8.5 U8.6 | length 387.3
  Top Layer w0.305: U3.8 33.464,31.65 33.587,31.773 33.643,31.773 33.952,32.082 33.952,33.585 33.938,33.6 ; U3.11 33.938,33.6 ; U3.14 33.386,35.55 33.453,35.617 33.453,36.178 33.525,36.25 ; C11.1 C10.1 33.938,33.6 ; C8.2 46.95,39.525 U1.5 ; U8.6 U8.5 ; U6.4 81.557,38.893 82.707,38.893 82.8,38.8
  Top Layer w0.635: J7.1 2.66,56.44 2.6,56.5 ; U5.5 30.65,15.35 28.8,13.5 ; U2.5 30.775,48.125 29.9,49 ; 33.525,36.25 34.35,37.075 38.05,37.075 ; J5.1@35.96,7.475 35.96,11.992 C2.1@35.952,12 ; C11.1 36.608,33.607 37.169,33.607 38.393,34.831 38.393,36.169 38.05,36.511 38.05,37.075 ; C8.2 43.025,39.525 41.3,41.25 38.05,41.25 ; U4.5 50.213,20.425 ; C17.2 51.65,20.8 51.275,20.425 50.213,20.425 ; C27.1 68.252,28.447 68.252,25.178 U8.5 U8.5 68.272,25.156 71.031,25.156 R44.1@71.05,25.137 ; C27.1@68.354,28.754 71.45,31.85 v2(85.75,31.85) 97.828,31.85 98.2,32.222 98.2,59.6 96.8,61 87.875,61 ; 82.8,38.8 C19.1 v2(85.7,38.8) ; R36.1 87.75,60.875 87.875,61 ; 2.6,47.575 10.075,47.575 11.5,49 29.9,49 ; 2.6,47.575 2.6,56.5 ; 2.6,47.575 2.6,14.125 3.225,13.5 28.8,13.5 ; 2.6,56.5 2.6,59.275 4.325,61 87.875,61 ; 28.8,13.5 30.3,12 C2.1@35.952,12 ; 29.9,49 37.678,49 38.05,48.628 38.05,41.25 ; C2.1@35.952,12 C2.1 47.9,12 50.213,14.313 50.213,20.425 ; 38.05,37.075 38.05,41.25
  Bottom Layer w0.635: v2(85.7,38.8) 85.725,38.775 85.725,31.875 v2(85.75,31.85)
AGND: C1.2 C2.2 C8.1 C10.2 C11.2 C17.1 C19.2 C20.2 C21.2 C22.2 C23.2 C25.2 C26.2 C27.2 C29.2 C30.2 C31.2 J4.2 J6.2 J7.4 J8.2 R3.2 R11.2 R26.2 R35.2 R39.2 R42.1 R46.2 R47.1 R_Pot1.2 TP1.1 U1.2 U2.2 U3.4 U4.2 U5.2 U6.11 U7.1 U7.2 U8.1 U8.2 U9.3 | length 16.2
  Top Layer w0.381: U8.1 U8.2 65.715,18.135 66.45,17.4 C29.2 ; U7.1 U7.2 83.465,18.085 84.2,17.35 C25.2
  Bottom Layer w0.381: 64.445,19.675 65.715,19.675 65.715,18.085 66.45,17.35 66.45,17.2 ; 82.195,19.625 83.465,19.625 83.465,18.035 84.2,17.3 84.2,17.15
  other v1: 5,5 15,5 20,5 25,5 30,5 35,5 40,5 45,5 50,5 55,5 60,5 65,5 70,5 80,5 90,5 95,5 12.5,10 17.5,10 22.5,10 27.5,10 32.5,10 37.5,10 52.5,10 57.5,10 62.5,10 67.5,10 72.5,10 77.5,10 82.5,10 87.5,10 92.5,10 25,15 35,15 40,15 45,15 60,15 80,15 90,15 32.5,20 37.5,20 42.5,20 62.5,20 72.5,20 87.5,20 92.5,20 5,25 15,25 45,25 50,25 55,25 60,25 75,25 90,25 95,25 7.5,30 17.5,30 22.5,30 37.5,30 42.5,30 47.5,30 52.5,30 62.5,30 67.5,30 72.5,30 77.5,30 97.5,30 10,35 20,35 50,35 60,35 65,35 70,35 80,35 90,35 95,35 27.5,40 57.5,40 62.5,40 92.5,40 10,45 15,45 25,45 35,45 40,45 45,45 55,45 60,45 65,45 70,45 80,45 90,45 95,45 47.5,50 57.5,50 62.5,50 67.5,50 92.5,50 50,55 55,55 60,55 65,55 70,55 75,55 85,55 90,55 95,55 7.5,60 12.5,60 17.5,60 22.5,60 27.5,60 32.5,60 37.5,60 42.5,60 47.5,60 57.5,60 62.5,60 67.5,60 72.5,60 77.5,60 82.5,60 92.5,60
DGND: P1.1 R47.2 TP2.1 | length 5.7
  Top Layer w0.381: 20.7,55.9 20.71,55.89 26.406,55.89 P1.1
EMG_Out_A: C9.2 J2.1 R11.1 R17.2 TP4.1 U1.1 | length 44.5
  Top Layer w0.305: U1.1 47.248,36.873 47.248,37.247 48.176,38.175 51.2,38.175 53.662,38.175 R17.2 53.725,35.688 R11.1 53.714,35.575 53.943,35.346 53.943,35.245 55.9,33.287 TP4.1 55,19.6 55,7.7 53.9,6.6 51.81,6.6 J2.1
EMG_Out_B: C18.2 J2.2 R26.1 R32.2 TP5.1 U4.1 | length 27.4
  Top Layer w0.305: R32.2 48.287,18.087 C18.2 48.3,20.899 49.15,21.749 U4.1 51.671,23.375 51.9,23.146 R26.1 51.9,23.011 53.936,20.975 53.936,20.564 TP5.1 54,8.27 J2.2
Flex_Out: C1.1 J2.4 J5.2 R3.1 TP3.1 | length 25.3
  Top Layer w0.305: J5.2 42.793,7.375 42.8,7.382 42.971,7.382 43.2,7.611 R3.1 43.313,7.6 TP3.1 46.8,6.9 47.8,5.9 56.673,5.9 58.383,7.61 J2.4 58.41,7.62 58.41,10.89 C1.1
GSR_IN: J4.1 R41.2 TP7.1 U6.5 | length 22.3
  Top Layer w0.305: U6.5@82.178,39.6 82.155,39.578 81.578,39.578 U6.5 80.25,39.55 78.7,41.1 78.7,42.114 80.186,43.6 R41.2 80.389,43.6 82.889,41.1 TP7.1 86.815,41.115 94.21,41.115 J4.1
GSR_OUT: C21.1 J2.3 R40.2 TP6.1 | length 41
  Top Layer w0.305: J2.3 55.979,7.709 55.979,18.579 57.709,20.309 57.798,20.309 57.9,20.411 57.9,34.2 60.5,36.8 C21.1 67.85,36.8 68.275,37.225 R40.2
HR_SCL: J7.3 P1.7 | length 36.9
  Bottom Layer w0.305: J7.3 37.585,51.36 41.542,55.317 41.542,55.766 P1.7
HR_SDA: J7.2 P1.6 | length 33.8
  Bottom Layer w0.381: J7.2 7.55,53.25 36.8,53.25 39.016,55.466 39.016,55.78 P1.6
NetC3_2: C3.2 R9.2 R12.2 | length 6
  Top Layer w0.305: C3.2@39.4,35.5 39.413,35.513 R12.2 41.75,35.614 41.979,35.843 42.08,35.843 43.475,37.237 R9.2
NetC4_2: C4.2 R10.2 U2.4 | length 8.4
  Top Layer w0.305: U2.4 33.075,43.65 C4.2 ; C4.2@33.15,43.675 34.521,43.675 34.7,43.496 34.7,41.389 33.2,39.889 R10.2
NetC9_1: C9.1 R17.1 R18.2 U1.4 | length 8.2
  Top Layer w0.305: R18.2 47.304,41.859 47.304,41.596 48.975,39.925 U1.4 50.725,39.65 51.05,39.975 51.2,39.975 53.562,39.975 R17.1
NetC12_2: C12.2 R25.2 U5.4 | length 8.7
  Top Layer w0.305: C12.2@26.6,19.8 28.625,19.8 U5.4 28.75,20.2 29.65,21.1 33.813,21.1 33.97,20.943 34.071,20.943 34.3,20.714 R25.2
NetC14_2: C14.2 R24.2 R27.2 | length 14
  Top Layer w0.305: C14.2 34.55,25.7 35.563,24.687 R27.2 R24.2
NetC18_1: C18.1 R32.1 R33.2 U4.4 | length 7.6
  Top Layer w0.305: R33.2@44.1,19.013 45.737,19.013 C18.1@46.5,18.25 ; R32.1 46.5,16.113 C18.1@46.5,18.25 ; U4.4 47.25,19 C18.1@46.5,18.25
NetC20_1: C20.1 R36.2 R37.1 R39.1 R41.1 | length 12.2
  Top Layer w0.305: R41.1 78.746,43.6 78.975,43.829 R37.1 80.025,46.1 80.4,45.725 C20.1 82.8,45.725 82.973,45.552 84.287,44.238 R39.1 R36.2
NetC23_1: C23.1 J8.1 U7.5 U7.6 | length 137.2
  Top Layer w0.635: J8.1 8.33,10.07 9.5,8.9 9.5,5 12.6,1.9 96.1,1.9 98.1,3.9 98.1,25.6 95.3,28.4 C23.1 86.015,28.39 86.015,25.135 U7.5 U7.6
NetJ1_1: J1.1 R1.2 | length 7
  Top Layer w0.635: J1.1 8.3,41.9 11.288,44.888 R1.2
NetJ1_2: J1.2 R8.2 | length 6.2
  Top Layer w0.305: J1.2 11.989,39.4 12.8,40.211 R8.2
NetJ1_3: J1.3 R13.2 | length 6
  Top Layer w0.305: J1.3 12.571,36.9 12.8,37.129 R13.2
NetJ2_5: J2.5
NetJ2_6: J2.6
NetJ3_1: J3.1 R2.2 | length 7.7
  Top Layer w0.635: J3.1 10.675,29.375 12.838,29.375 R2.2
NetJ3_2: J3.2 R23.2 | length 7
  Top Layer w0.305: J3.2 8.4,23 10.1,21.3 12.887,21.3 R23.2
NetJ3_3: J3.3 R28.2 | length 11.1
  Top Layer w0.305: J3.3 5.6,21.7 5.6,23.4 6.513,24.313 12.8,24.313 R28.2
NetM1_1: M1.1
NetM2_1: M2.1
NetM3_1: M3.1
NetM4_1: M4.1
NetP1_2: P1.2
NetP1_3: P1.3
NetP1_4: P1.4
NetP1_5: P1.5
NetR6_1: R6.1 R7.2 R8.1 | length 7.8
  Top Layer w0.305: R8.1 R7.2 16.1,42.889 18.511,45.3 R6.1
NetR9_1: R9.1 U1.3 | length 5
  Top Layer w0.305: R9.1 48.312,35.663 48.652,36.003 48.652,36.102 48.975,36.425 U1.3
NetR13_1: R13.1 R14.2 R15.1 | length 7
  Top Layer w0.305: R13.1 16,35.613 R14.2 16.1,35.611 17.882,33.829 18.584,33.829 R15.1
NetR16_1: R16.1 R18.1 | length 3.1
  Top Layer w0.305: R18.1 47.9,43.662 49.12,42.443 49.221,42.443 49.45,42.214 R16.1
NetR21_1: R21.1 R22.2 R23.1 | length 7
  Top Layer w0.305: R23.1 R22.2 17.598,19.613 19.211,18 R21.1
NetR24_1: R24.1 U4.3 | length 3.3
  Top Layer w0.305: R24.1 44.05,23.146 44.279,23.375 U4.3
NetR28_1: R28.1 R29.2 R30.1 | length 7.7
  Top Layer w0.305: R28.1 R29.2 16.2,26.889 18.611,29.3 R30.1
NetR31_1: R31.1 R33.1 | length 3.5
  Top Layer w0.381: R31.1 42.602,18.888 44.125,20.411 R33.1
NetR34_1: R34.1 U6.1 U6.2 | length 10.3
  Top Layer w0.305: R34.1 75.802,43.6 77.7,41.702 77.7,39.9 80.622,36.978 81.522,36.978 U6.1 U6.2
NetR34_2: R34.2 R38.2 U6.9 | length 11.6
  Top Layer w0.305: R38.2 73,37.314 73.764,38.079 73.764,39.464 74.5,40.2 U6.9 77.021,40.2 77.2,40.379 77.2,41.3 76.6,41.9 75.2,41.9 74.4,42.7 R34.2@74.4,43.6
NetR35_1: R35.1 R37.2 R_Pot1.3 U6.3 | length 26.6
  Top Layer w0.305: R_Pot1.3 72.25,49.45 71.1,48.3 R35.1 76.486,45.287 77.298,46.1 R37.2 77.4,43 78.232,42.168 78.232,40.668 80.622,38.278 81.522,38.278 U6.3
NetR38_1: R38.1 R40.1 U6.8 | length 7.1
  Top Layer w0.305: R40.1 72.987,38.8 R38.1 73,40.2 73.65,40.85 U6.8
NetR42_2: R42.2 R43.1 U6.10 | length 8.9
  Top Layer w0.305: R42.2@74.344,34.143 74.43,34.229 74.43,38.901 74.957,39.427 75.013,39.427 75.136,39.55 U6.10 ; R42.2 R43.1
NetR43_2: R43.2 U6.6 U6.7 | length 22.6
  Top Layer w0.305: R43.2 87.6,34 88.6,35 88.6,39.1 87.5,40.2 U6.6 U6.7
NetR45_2: R45.2 R46.1 U9.1 | length 5.2
  Top Layer w0.381: R46.1@73.55,21.187 73.55,21.086 73.961,20.675 R45.2 76.088,22.712 75.95,22.85 U9.1
NetR_Pot1_1: R_Pot1.1
NetU6_12: U6.12
NetU6_13: U6.13
NetU6_14: U6.14
NetU7_7: U7.7
NetU7_8: U7.8
NetU8_7: U8.7
NetU8_8: U8.8
REFA: C4.1 R4.2 U2.1 U3.12 | length 18.7
  Top Layer w0.305: U2.1 27.857,45.518 28.882,45.518 29.3,45.1 29.3,43.1 30.387,42.013 R4.2 ; U3.12 31.45,34.25 29.615,36.085 29.615,38.701 29.6,38.716 29.6,40.414 30.286,41.1 R4.2 ; C4.1 31.164,41.775 30.489,41.1 R4.2
REFB: C12.1 R19.2 U3.10 U5.1 | length 17.2
  Top Layer w0.305: C12.1@26.6,21.6 29.749,21.6 30.477,22.328 30.477,22.702 U5.1 30.65,24.459 29.715,25.394 29.715,27.729 30.386,28.4 R19.2 30.487,31.487 31.95,32.95 U3.10
RGA: R4.1 R5.2 U3.1 | length 6.4
  Top Layer w0.305: U3.1 27.306,35.55 27.373,35.617 27.373,36.849 R5.2@28.725,38.202 ; R4.1 28.813,38.213 R5.2
RGB: R19.1 R20.2 U3.7 | length 6.6
  Top Layer w0.305: U3.7 27.05,30.263 28.582,28.73 28.582,28.629 28.811,28.4 R19.1 28.925,28.387 R20.2
V_Batt: C22.1 C25.1 C26.1 C29.1 J6.1 U7.3 U7.4 U8.3 U8.4 | length 41.6
  Top Layer w0.635: U8.3 68.25,19.725 68.252,19.722 68.252,17.253 C29.1 68.25,17.1 68.257,17.093 68.407,17.093 71.343,14.157 74.418,14.157 75,13.575 C26.1 C26.1@75.35,13.1 ; C26.1@75.583,13.332 C26.1@75.35,13.1 ; U7.3 86,19.675 86.002,19.673 86.002,17.203 C25.1 86,14.675 84.9,13.575 C22.1 ; J6.1 85.28,13.13 C22.1 ; C26.1@75.35,13.1 84.55,13.1 C22.1
VIN_+A: C6.1 C7.1 R14.1 U3.3 | length 13.5
  Top Layer w0.305: R14.1 17.337,37.287 18.85,38.8 C6.1 21.15,38.8 21.75,38.2 C7.1 22.05,38.2 26,34.25 U3.3
VIN_+B: C15.1 C16.1 R29.1 U3.5 | length 17.4
  Top Layer w0.305: R29.1 19.413,24.413 19.677,24.677 19.677,24.827 19.85,25 C15.1 20.05,25.05 22.75,25.05 C16.1 22.95,25.1 23.123,25.273 23.123,25.423 24.6,26.9 24.6,31.8 25.75,32.95 U3.5
VIN_-A: C5.2 C6.2 R7.1 U3.2 | length 14.3
  Top Layer w0.305: R7.1 18.563,40.313 18.85,40.6 C6.2 21.55,40.6 21.75,40.4 C5.2@21.9,40.4 ; C5.2 22.05,40.6 25.5,37.15 25.5,35.879 26.357,35.023 26.413,35.023 26.536,34.9 U3.2
VIN_-B: C13.2 C15.2 R22.1 U3.6 | length 18.9
  Top Layer w0.305: R22.1 16.2,21.289 16.429,21.518 16.53,21.518 18.213,23.2 C15.2 20.05,23.15 22.75,23.15 C13.2 22.95,23.1 23.123,23.273 23.123,23.423 25.2,25.5 25.2,31.021 26.451,32.272 27.022,32.272 U3.6
VOUT_A: C3.1 R5.1 R10.1 U3.13 | length 13
  Top Layer w0.305: R10.1 33.187,38.2 R5.1 30.4,36.293 31.793,34.9 U3.13 37.15,34.9 37.6,35.35 C3.1@37.6,35.5 ; C3.1 C3.1@37.493,35.65
VOUT_B: C14.1 R20.1 R25.1 U3.9 | length 14.7
  Top Layer w0.305: R20.1 R20.1@30.602,25.9 ; U3.9 32.436,32.3 32.313,32.177 32.257,32.177 31.5,31.421 31.5,29.979 31.679,29.8 32.7,29.8 C14.1 32.75,28.048 R20.1@30.602,25.9 ; R25.1 34.3,22.289 34.071,22.518 33.984,22.518 R20.1@30.602,25.9

## Polygon pours and split planes (outlines as drawn)
AGND on Top Layer "AGND_L01_P000" (solid, pour order 0): 0,63.1 99.7,63.1 99.7,0.5 100.2,0 0,0 0,63.2
AGND on Bottom Layer "AGND_L02_P003" (solid, pour order 3): 0,63.1 99.7,63.1 99.7,0.5 100.2,0 0,0 0,63.2
no net on Bottom Layer "NONET_L02_P001" (solid, pour order 1): 12,55 12,59 45,59 46,58 45.95,57.95 45.95,50.2 4.8,50.2 4,51 4,55

## Keep-outs
Keep-Out Layer:
  lines w0.127: 1,2 ccw(c2,2) 2,1 97.705,1 ccw(c97.705,2.295) 99,2.295 99,61 ccw(c98,61) 98,62 2,62 ccw(c2,61) 1,61 1,2
  lines w0.254: 15.968,7.694 ccw(c13.97,7.61) 15.97,7.601 ; 17.236,55.751 cw(c15.24,55.87) 17.24,55.87 ; 68.036,40.498 cw(c66.04,40.63) 68.04,40.63 ; 68.039,12.751 ccw(c66.04,12.69) 68.04,12.69

## Silkscreen, mask and mechanical layers (free items; w line width, h text height)
Mechanical 15:
  lines w0.127: -8.25,3.35 ccw(c-8.25,3.6) -8,3.6 ; 99.75,0 0.25,0 cw(c0.25,0.25) 0,0.25 0,62.75 cw(c0.25,62.75) 0.25,63 ; 100,0.25 100,62.75 ccw(c99.75,62.75) 99.75,63 0.25,63 ; 0.25,63 0.25,63